# Altium PCB muxduino-shield.PcbDoc
Units mil, origin at the board's own origin, x right, y up, seen from the top; angles counter-clockwise.
Board outline 6000 x 6000 mil, 2 copper layers (Top Layer, Bottom Layer); 29 components, 40 nets, 144 pads, 0 vias.
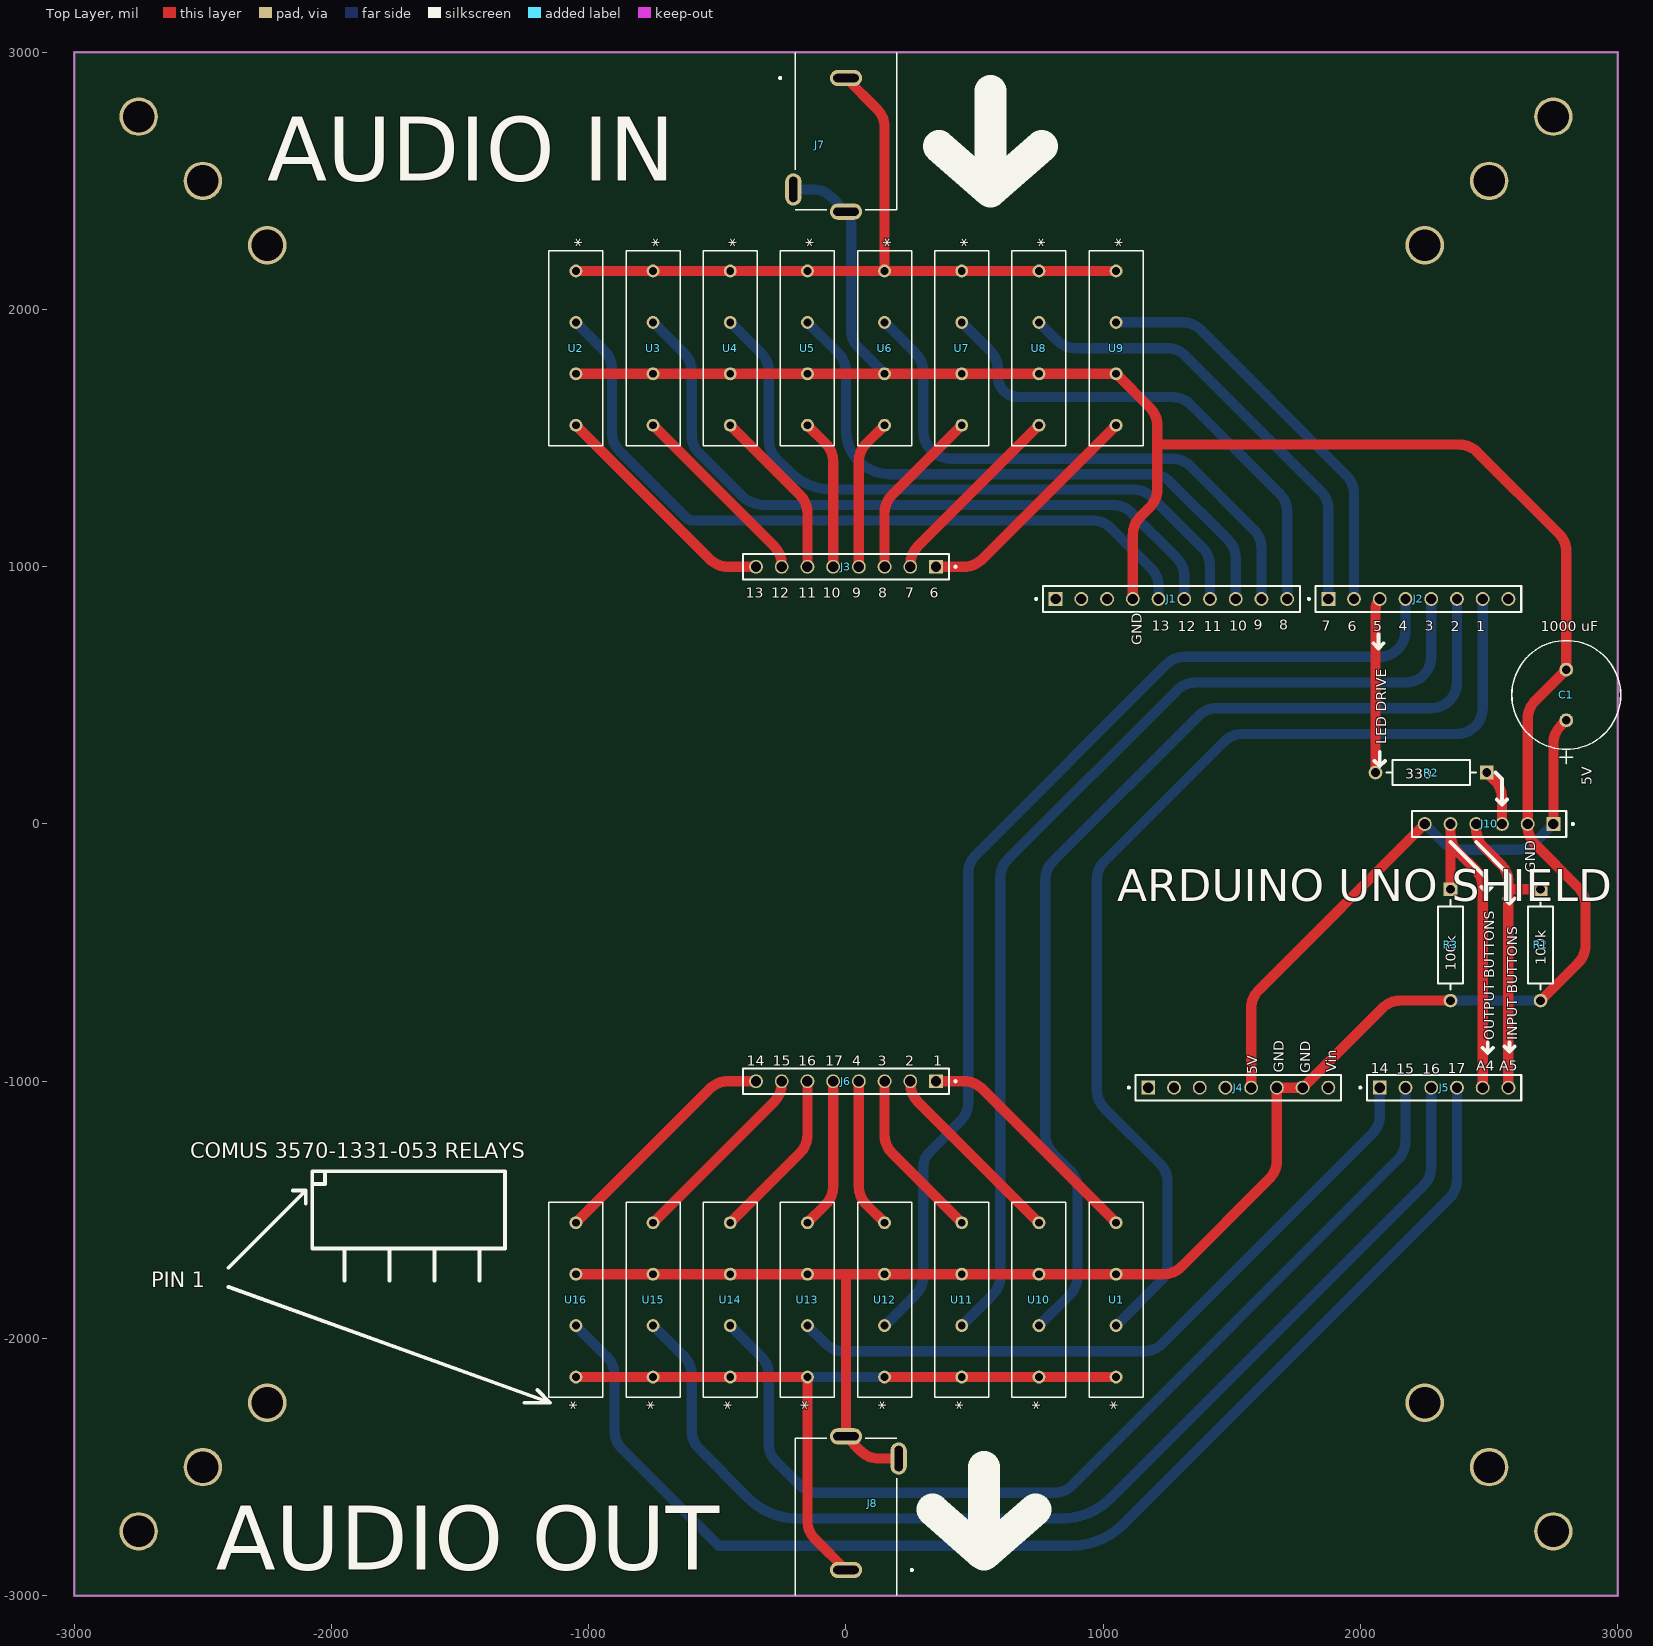
[diagram p0: Top Layer view]
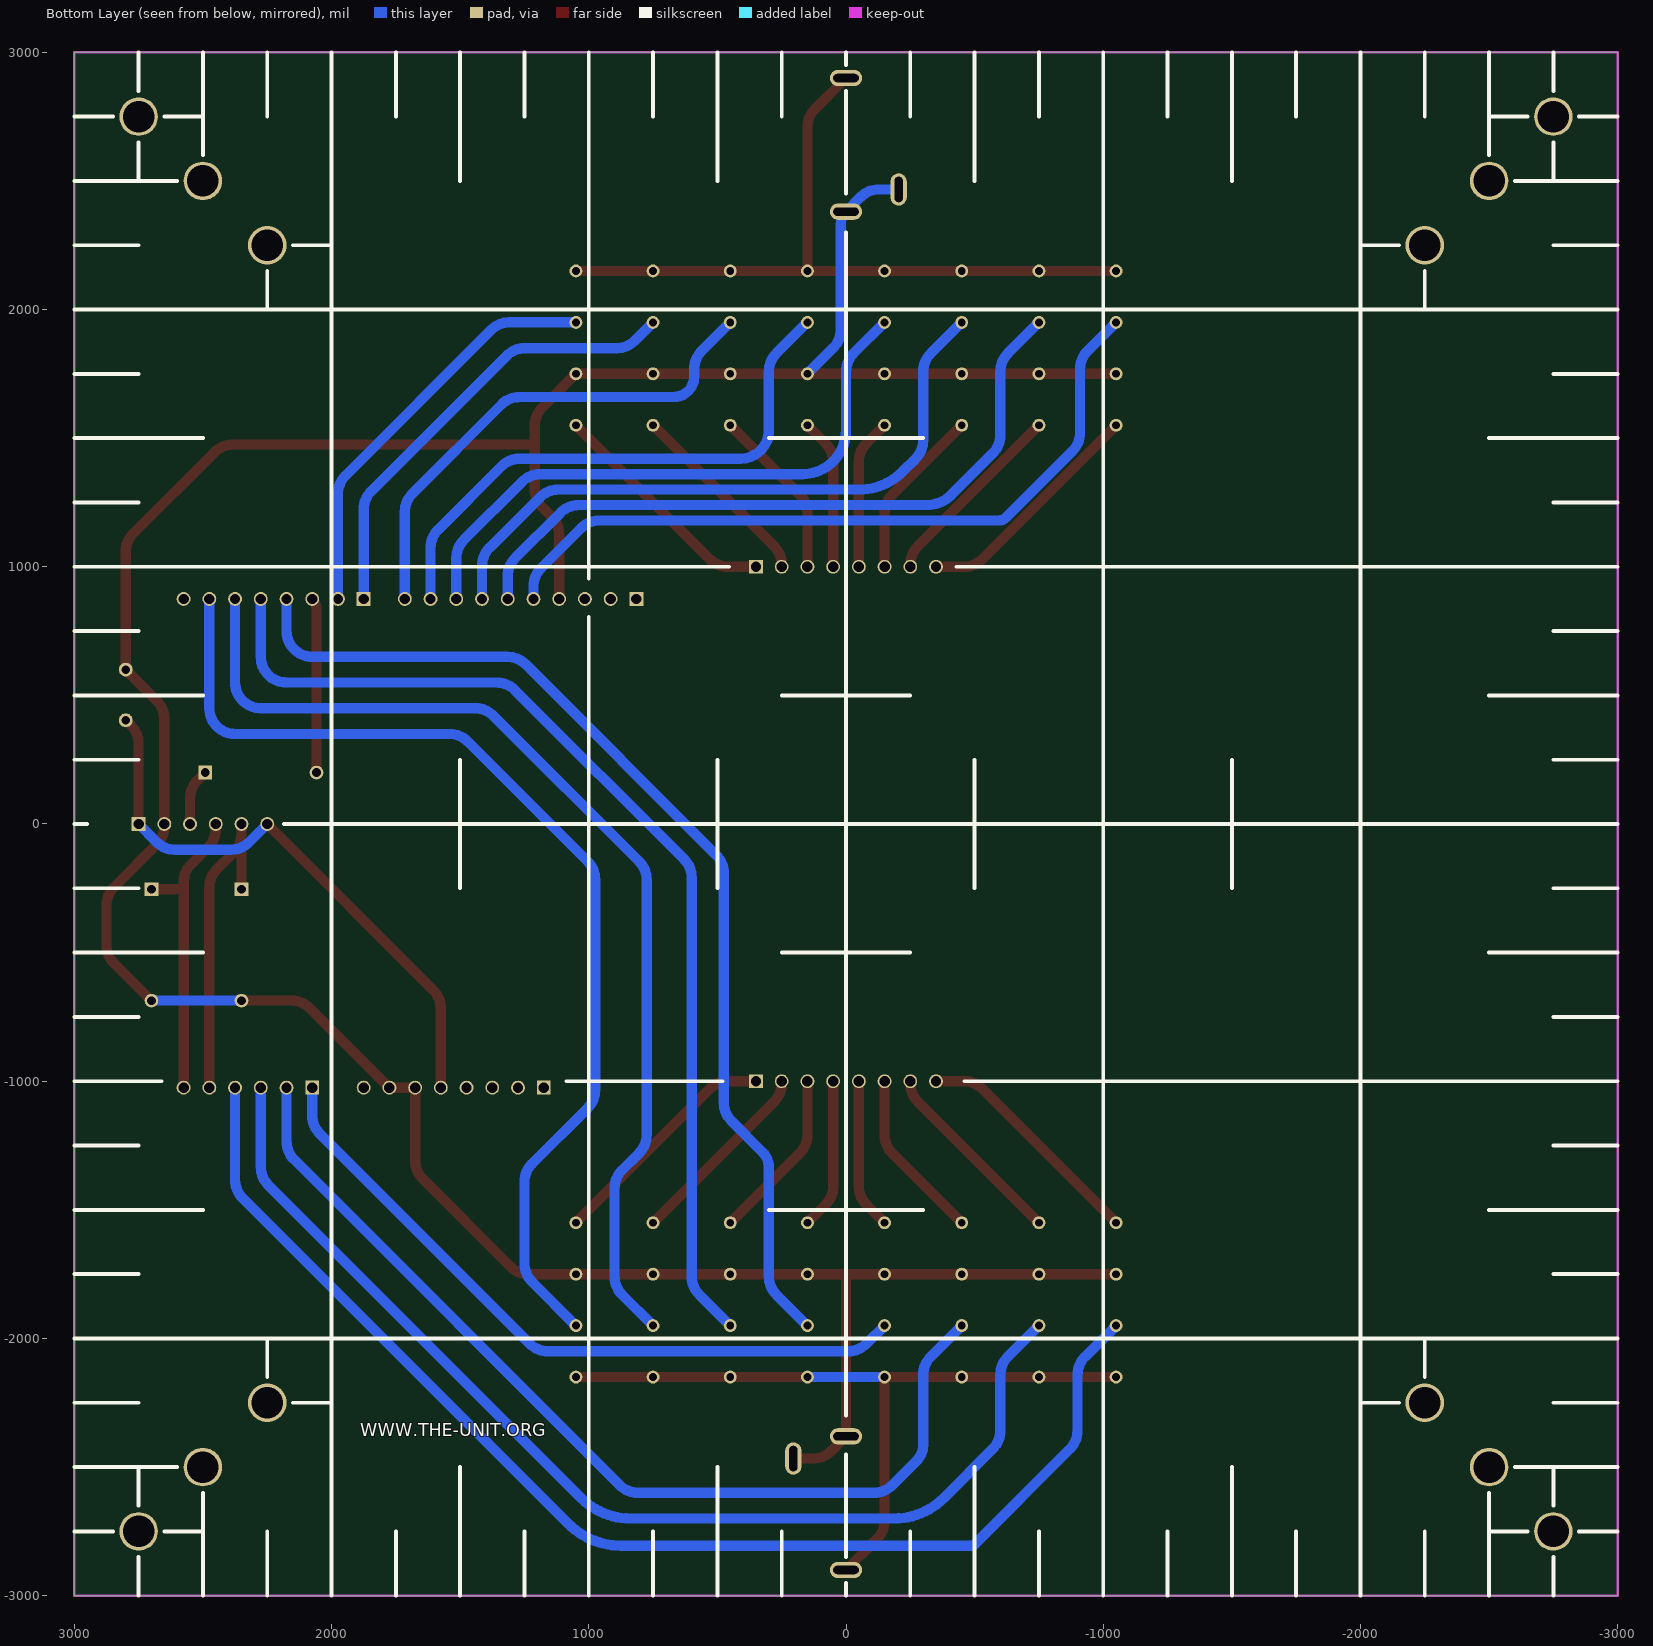
[diagram p1: Bottom Layer view, seen from below]
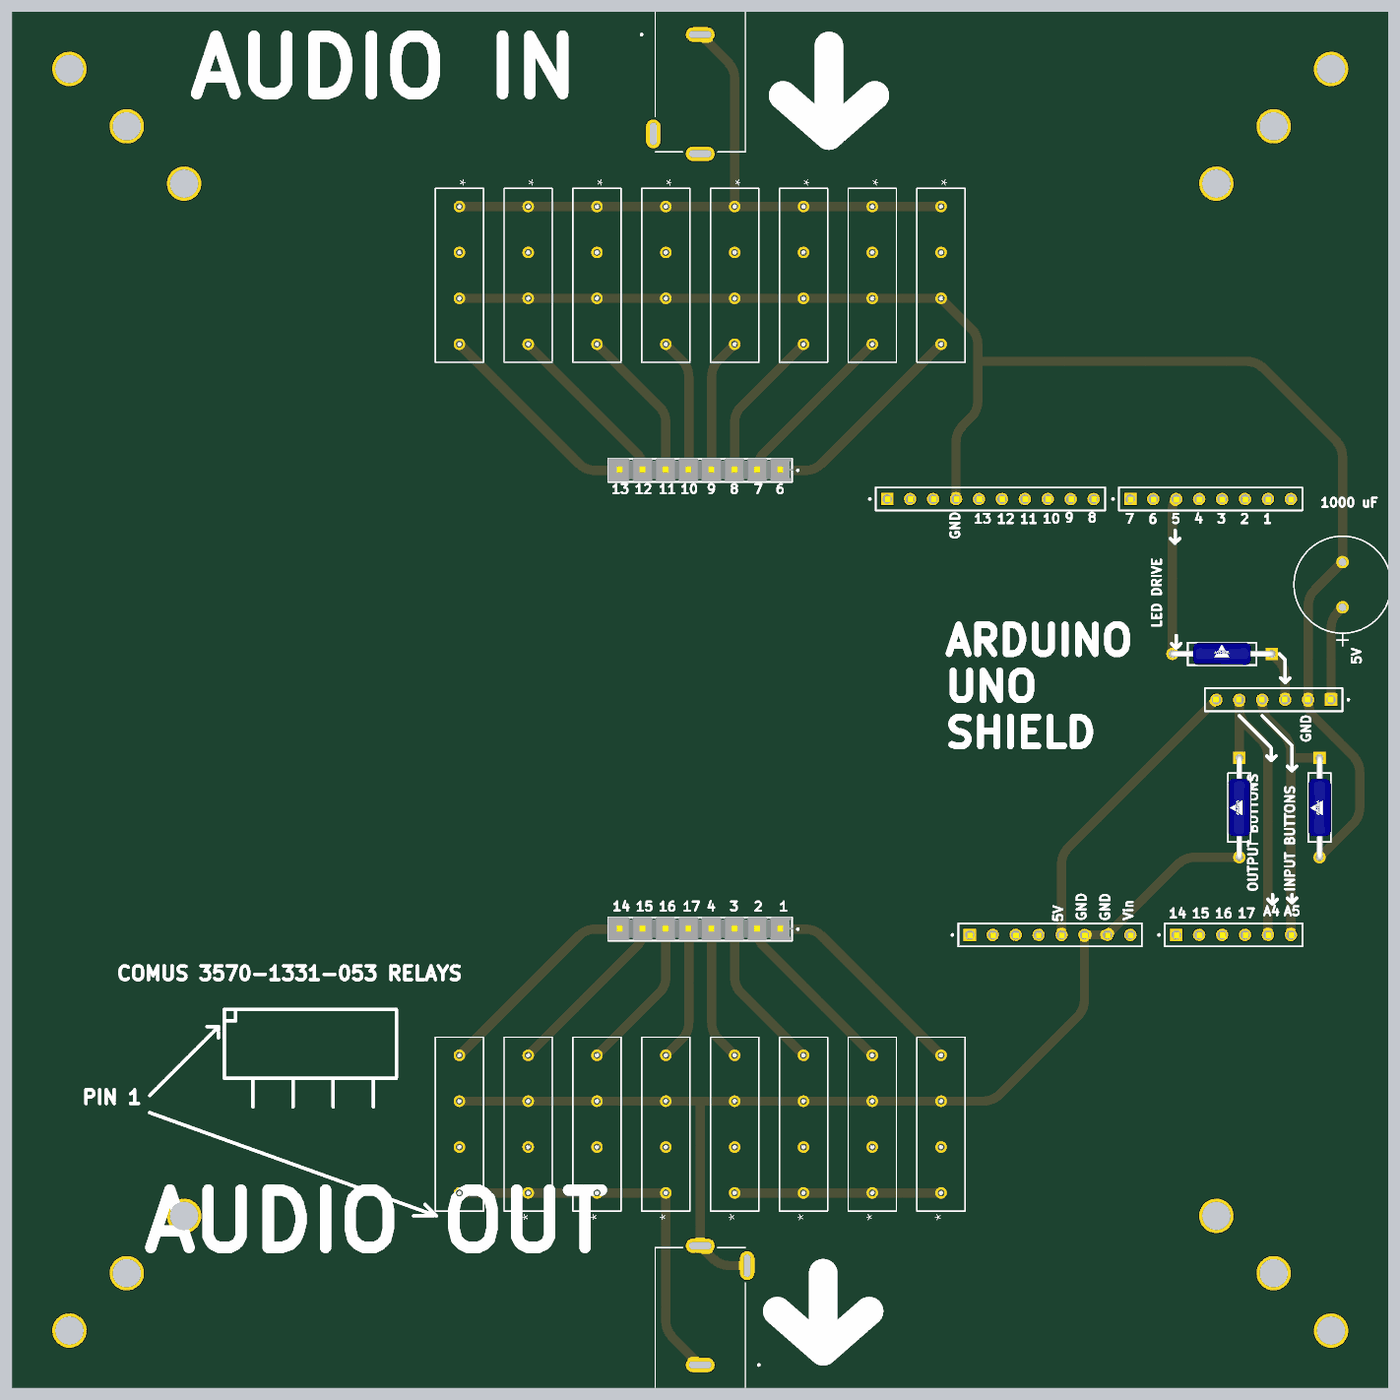
[diagram p2: 3D render of the assembled board from above, using the file's embedded part models]

## Layer stack, top to bottom
Top Solder: solder mask 0.4, Solder Resist, Dk 3.5
Top Layer: signal copper 1.4
Dielectric 1: dielectric 12.6, FR-4, Dk 4.8
Bottom Layer: signal copper 1.4
Bottom Solder: solder mask 0.4, Solder Resist, Dk 3.5

## Board outline
-3000,-3000 -3000,3000 3000,3000 3000,-3000

## Design rules (kind name [scope] priority, off if disabled: settings)
Clearance [All] p1: gap=10 ignorepadtopadclearanceinfootprint=FALSE except(0: Arc-Hole Track-Hole SMDPad-Hole THPad-Hole Via-Hole Fill-Hole Poly-Hole Region-Hole Text-Hole; 4: Arc-Arc Arc-Track Arc-SMDPad Track-Track Track-SMDPad SMDPad-SMDPad)
PolygonConnect [All] p1: connectstyle=Relief reliefconductorwidth=10 reliefentries=4 polygonreliefangle="90 Angle" airgapwidth=10
RoutingVias [All] p1: holewidth=28 width=50 viastyle="Through Hole" minholewidth=28 minwidth=50 maxholewidth=28 maxwidth=50
SolderMaskExpansion [All] p1: expansion=4 istentingtop=FALSE
Width [All] p1: maxlimit=50 minlimit=10 preferedwidth=40 minimp=50.000000 maximp=50.000000 favimp=50.000000
30 further rules are at their usual default settings.

## Classes and differential pairs
component class muxduino-shield: C1 J1 J2 J4 J5 J6 J7 J8 J10 R1 R2 R3 U1 U10 U11 U12 U13 U14 U15 U16

## Components (designator, comment, footprint, x,y, rotation, side; value= is the part's Value field where it differs from the comment)
C1 "16PK1000MEFC10X12.5" CAP_PKPZ_10X12P5_LOW_RUB 2800,403.15 r90 top
J1 "TSW-110-07-G-S" SAMTEC_TSW-110-07-G-S 1265,875 r0 top
J2 "TSW-108-07-G-S" SAMTEC_TSW-108-07-G-S 2225,875 r0 top
J3 "TSW-108-07-G-S-topside" SAMTEC_TSW-108-07-G-S-topside 0,1000 r180 top
J4 "TSW-108-07-G-S" SAMTEC_TSW-108-07-G-S 1525,-1025 r0 top
J5 "TSW-106-07-G-S" SAMTEC_TSW-106-07-G-S 2325,-1025 r0 top
J6 "TSW-108-07-G-S-topside" SAMTEC_TSW-108-07-G-S-topside 0,-1000 r180 top
J7 "MJ-3536N" CUI_MJ-3536N 0,2900 r180 top
J8 "MJ-3536N" CUI_MJ-3536N 0,-2900 r0 top
J10 "TSW-106-07-G-S" SAMTEC_TSW-106-07-G-S 2500,0 r180 top
R1 "100k" FP-RLR07-MFG 2700,-470 r270 top
R2 "330 ohm" FP-RLR07-MFG 2275,200 r180 top
R3 "100k" FP-RLR07-MFG 2350,-470 r270 top
U1 "3570-1331-051" SIP_3570-1331_COM 1050,-2150 r90 top
U2 "3570-1331-051" SIP_3570-1331_COM -1050,2150 r270 top
U3 "3570-1331-051" SIP_3570-1331_COM -750,2150 r270 top
U4 "3570-1331-051" SIP_3570-1331_COM -450,2150 r270 top
U5 "3570-1331-051" SIP_3570-1331_COM -150,2150 r270 top
U6 "3570-1331-051" SIP_3570-1331_COM 150,2150 r270 top
U7 "3570-1331-051" SIP_3570-1331_COM 450,2150 r270 top
U8 "3570-1331-051" SIP_3570-1331_COM 750,2150 r270 top
U9 "3570-1331-051" SIP_3570-1331_COM 1050,2150 r270 top
U10 "3570-1331-051" SIP_3570-1331_COM 750,-2150 r90 top
U11 "3570-1331-051" SIP_3570-1331_COM 450,-2150 r90 top
U12 "3570-1331-051" SIP_3570-1331_COM 150,-2150 r90 top
U13 "3570-1331-051" SIP_3570-1331_COM -150,-2150 r90 top
U14 "3570-1331-051" SIP_3570-1331_COM -450,-2150 r90 top
U15 "3570-1331-051" SIP_3570-1331_COM -750,-2150 r90 top
U16 "3570-1331-051" SIP_3570-1331_COM -1050,-2150 r90 top

## Footprints (in the part's own frame and the unit in brackets; to place one, negate y for a bottom-side part, rotate by r counter-clockwise, add the part's x,y. Pads: shape width x height; smd on the part's side, far side on the other; paste and mask are expansions set on the pad)
CAP_PKPZ_10X12P5_LOW_RUB [mil]
  round 54 / inner round 60 / far side round 54 hole 34 paste-99999 mask+0: 1(0,0) 2(196.85,0)
  silkscreen extent -168,-212 310,212
CUI_MJ-3536N [mm]
  oval 3.2x1.6 hole 0.8 slot 2.5 at 0 deg: 1(0,0) 2(0,13.2)
  oval 1.6x3.2 hole 0.8 slot 2.5 at 90 deg: 3(5.2,11)
  silkscreen extent -5,-2.5 6.6,13
FP-RLR07-MFG [mm]
  rect 1.35x1.35 hole 0.85 paste-2539.97 mask+0: 1(-5.5,0)
  round 1.35 hole 0.85 paste-2539.97 mask+0: 2(5.5,0)
  silkscreen extent -4.43,-1.25 4.43,1.25, body extent -6.27,-1.35 6.27,1.35, height 0.25
SAMTEC_TSW-106-07-G-S [mm]
  rect 1.37x1.37 hole 1.02: 01(-6.35,0)
  round 1.37 hole 1.02: 02(-3.81,0) 03(-1.27,0) 04(1.27,0) 05(3.81,0) 06(6.35,0)
  silkscreen extent -8.37,-1.27 7.62,1.27, body extent -7.68,-1.32 7.68,1.22, height 1.34
SAMTEC_TSW-108-07-G-S [mm]
  rect 1.37x1.37 / inner round 1.37 / far side rect 1.37x1.37 hole 1.02: 01(-8.89,0)
  round 1.37 hole 1.02: 02(-6.35,0) 03(-3.81,0) 04(-1.27,0) 05(1.27,0) 06(3.81,0) 07(6.35,0) 08(8.89,0)
  silkscreen extent -10.91,-1.27 10.16,1.27, body extent -10.25,-1.34 10.2,1.2, height 1.34
SAMTEC_TSW-108-07-G-S-topside [mm]
  rect 1.37x1.37 / inner round 1.37 / far side rect 1.37x1.37 hole 1.02: 01(-8.89,0)
  round 1.37 hole 1.02: 02(-6.35,0) 03(-3.81,0) 04(-1.27,0) 05(1.27,0) 06(3.81,0) 07(6.35,0) 08(8.89,0)
  silkscreen extent -10.91,-1.27 10.16,1.27, body extent -10.25,-1.34 10.2,1.2, height 8.38
SAMTEC_TSW-110-07-G-S [mm]
  rect 1.37x1.37 / inner round 1.37 / far side rect 1.37x1.37 hole 1.02: 01(-11.43,0)
  round 1.37 hole 1.02: 02(-8.89,0) 03(-6.35,0) 04(-3.81,0) 05(-1.27,0) 06(1.27,0) 07(3.81,0) 08(6.35,0) 09(8.89,0) 10(11.43,0)
  silkscreen extent -13.45,-1.27 12.7,1.27, body extent -12.75,-1.3 12.78,1.24, height 1.34
SIP_3570-1331_COM [mil]
  round 50 / inner round 60 / far side round 50 hole 30 paste-99999 mask+0: 1(0,0) 2(200,0) 3(400,0) 4(600,0)
  silkscreen extent -79,-105 679,105, body extent -74,-100 674,100, height 130

## Part data
C1: "No Description Available", Mfr_Name=Rubycon, Copyright="Copyright (C) 2024 Ultra Librarian. All rights reserved.", Manufacturer_Part_Number=16PK1000MEFC10X12.5, RefDes=RefDes, Type=DEV
J1 J5 J7 J8 J10: Package=None, Availability=Unavailable, Price=None
  J1: MF="Samtec Inc.", MP=TSW-110-07-G-S
  J5 J10: MF="Samtec Inc.", MP=TSW-106-07-G-S
  J7 J8: MF="{'manufacturer': u'CUI Devices'}", MP=MJ-3536N
J2 J3 J4 J6: "TSW - Samtec 2.54mm Pin Header 10.92mm Overall Pin Length (07) - Fast Stock", Package=None, Check_prices=https://www.snapeda.com/parts/TSW-108-07-G-S/Samtec+Inc./view-part/?ref=eda, MF="Samtec Inc.", MP=TSW-108-07-G-S, SnapEDA_Link=https://www.snapeda.com/parts/TSW-108-07-G-S/Samtec+Inc./view-part/?ref=snap
R1 R2 R3: library part CMP-00030-39449004-1, "RLR07C1002FSB14 Fixed Resistor, Metal Film, 0.25W, 10000ohm, 250V, 1% +/-Tol, 100ppm/Cel, Through Hole Mount", Case/Package=Conformal, Max Operating Temperature=150°C, Max Power Dissipation=250mW, Min Operating Temperature=-65°C, Resistance=10kΩ, Temperature Coefficient=100ppm/°C, Tolerance=1%, Voltage Rating=250V, Composition="Metal Film", Contact Plating="Lead, Tin", Diameter=2.29mm, Failure Rate=0.001%, Features="Military, Moisture Resistant, Weldable", Lead Diameter=640µm, Lead Free="Contains Lead", Lead Length=38.1mm, Length=7.62mm, Military Standard=MIL-PRF-39017, Mount="Through Hole", NexarPartId=39449004, Number of Pins=14, Number of Terminations=2, Packaging=Bulk, Power Rating=250mW, Radiation Hardening=No, REACH SVHC=Unknown, RoHS=Non-Compliant, Schedule B="8533210090, 8533210090", Termination=Axial, Voltage Rating (DC)=250V, Width=2.29mm, Wire/Cable Diameter=50.8µm
U1 U2 U3 U4 U5 U6 U7 U8 U9 U10 U11 U12 U13 U14 U15 U16: "No Description Available", Mfr_Name=Comus, Copyright="Copyright (C) 2024 Ultra Librarian. All rights reserved.", Manufacturer_Part_Number=3570-1331-051, RefDes=RefDes, Type=DEV

## Free pads (board coordinates)
  round 150 hole 123 unplated: 8(-2750,-2750) 8(-2750,2750) 8(-2500,-2500) 8(-2500,2500) 8(-2250,-2250) 8(-2250,2250) 8(2250,-2250) 8(2250,2250) 8(2500,-2500) 8(2500,2500) 8(2750,-2750) 8(2750,2750)

## Nets (pads, with @x,y where several pads share a name; then routed paths per layer and width w, separated by ;. In a path a pad name is that pad's centre, name@x,y a point inside that pad or via, vN(x,y) a via of type N, cw(c..) or ccw(c..) an arc to the next point about the centre after c; other vN are vias at no path point)
GND: C1.2 J1.04 J4.06 J4.07 J7.2 J7.3 J8.2 J8.3 J10.02 R1.2 R3.2 U1.3 U2.3 U3.3 U4.3 U5.3 U6.3 U7.3 U8.3 U9.3 U10.3 U11.3 U12.3 U13.3 U14.3 U15.3 U16.3 | length 12957.7
  Top Layer w40: U16.3 U15.3 U14.3 U13.3 0,-1750 ; U2.3 U3.3 U4.3 U5.3 U6.3 U7.3 U8.3 U9.3 1180.71,1619.29 cw(c1110,1548.58) 1210,1548.58 1210,1475 ; 57.32,-2437.64 J8.2 0,-1750 ; 57.32,-2437.64 ccw(c128.04,-2366.93) 128.04,-2466.93 J8.3 ; J1.04 1115,1123.58 cw(c1215,1123.58) 1144.29,1194.29 1180.71,1230.71 ccw(c1110,1301.42) 1210,1301.42 1210,1475 ; R3.2 2154.89,-686.54 ccw(c2154.89,-786.54) 2084.17,-715.82 J4.07 J4.06 1675,-1308.58 cw(c1575,-1308.58) 1645.71,-1379.29 1304.29,-1720.71 cw(c1233.58,-1650) 1233.58,-1750 U1.3 U10.3 U11.3 U12.3 0,-1750 ; R1.2 2845.71,-540.82 ccw(c2775,-470.11) 2875,-470.11 2875,-316.42 ccw(c2775,-316.42) 2845.71,-245.71 2679.29,-79.29 cw(c2750,-8.58) 2650,-8.58 J10.02 2650,408.58 cw(c2750,408.58) 2679.29,479.29 C1.2 2800,1058.58 ccw(c2700,1058.58) 2770.71,1129.29 2454.29,1445.71 ccw(c2383.58,1375) 2383.58,1475 1210,1475
  Bottom Layer w40: J7.3 -128.04,2466.93 cw(c-128.04,2366.93) -57.32,2437.64 J7.2 cw(c-48.28,2332.03) 20,2332.03 20,1921.42 ccw(c120,1921.42) 49.29,1850.71 U6.3 ; R3.2 R1.2
NetC1_1: C1.1 J4.05 J10.01 J10.06 | length 2294.1
  Top Layer w40: J4.05 1575,-716.42 cw(c1675,-716.42) 1604.29,-645.71 J10.06 ; J10.01 2750,311.73 cw(c2850,311.73) 2779.29,382.44 C1.1
  Bottom Layer w40: J10.06 2320.71,-70.71 ccw(c2391.42,0) 2391.42,-100 2608.58,-100 ccw(c2608.58,0) 2679.29,-70.71 J10.01
NetJ1_05: J1.05 U2.2 | length 2937.7
  Bottom Layer w40: U2.2 -939.29,1839.29 cw(c-1010,1768.58) -910,1768.58 -910,1521.42 ccw(c-810,1521.42) -880.71,1450.71 -619.29,1189.29 ccw(c-596.86,1211.71) -596.86,1180 958.58,1180 cw(c958.58,1080) 1029.29,1150.71 1185.71,994.29 cw(c1115,923.58) 1215,923.58 J1.05
NetJ1_06: J1.06 U3.2 | length 2756.8
  Bottom Layer w40: U3.2 -629.29,1829.29 cw(c-700,1758.58) -600,1758.58 -600,1511.42 ccw(c-500,1511.42) -570.71,1440.71 -409.29,1279.29 ccw(c-314.44,1374.14) -314.44,1240 1038.58,1240 cw(c1038.58,1140) 1109.29,1210.71 1285.71,1034.29 cw(c1215,963.58) 1315,963.58 J1.06
NetJ1_07: J1.07 U4.2 | length 2587.5
  Bottom Layer w40: U4.2 -329.29,1829.29 cw(c-400,1758.58) -300,1758.58 -300,1491.42 ccw(c-200,1491.42) -270.71,1420.71 -219.29,1369.29 ccw(c-52.01,1536.57) -52.01,1300 1118.58,1300 cw(c1118.58,1200) 1189.29,1270.71 1385.71,1074.29 cw(c1315,1003.58) 1415,1003.58 J1.07
NetJ1_08: J1.08 U5.2 | length 2399.3
  Bottom Layer w40: U5.2 -29.29,1829.29 cw(c-100,1758.58) 0,1758.58 0,1530 ccw(c170,1530) 170,1360 1188.58,1360 cw(c1188.58,1260) 1259.29,1330.71 1485.71,1104.29 cw(c1415,1033.58) 1515,1033.58 J1.08
NetJ1_09: J1.09 U6.2 | length 2213.3
  Bottom Layer w40: U6.2 270.71,1829.29 cw(c200,1758.58) 300,1758.58 300,1530 ccw(c410,1530) 410,1420 1268.58,1420 cw(c1268.58,1320) 1339.29,1390.71 1585.71,1144.29 cw(c1515,1073.58) 1615,1073.58 J1.09
NetJ1_10: J1.10 U7.2 | length 1973.5
  Bottom Layer w40: U7.2 560.71,1839.29 cw(c490,1768.58) 590,1768.58 590,1740 ccw(c670,1740) 670,1660 1268.58,1660 cw(c1268.58,1560) 1339.29,1630.71 1685.71,1284.29 cw(c1615,1213.58) 1715,1213.58 J1.10
NetJ2_01: J2.01 U8.2 | length 1785.8
  Bottom Layer w40: U8.2 820.71,1879.29 ccw(c891.42,1950) 891.42,1850 1248.58,1850 cw(c1248.58,1750) 1319.29,1820.71 1845.71,1294.29 cw(c1775,1223.58) 1875,1223.58 J2.01
NetJ2_02: J2.02 U9.2 | length 1625.3
  Bottom Layer w40: U9.2 1308.58,1950 cw(c1308.58,1850) 1379.29,1920.71 1945.71,1354.29 cw(c1875,1283.58) 1975,1283.58 J2.02
NetJ2_03: J2.03 R2.2 | length 679.4
  Top Layer w40: R2.2 2058.46,835.08 cw(c2114.92,835.08) J2.03
NetJ2_04: J2.04 U12.2 | length 4127.2
  Bottom Layer w40: U12.2 270.71,-1829.29 ccw(c200,-1758.58) 300,-1758.58 300,-1335.36 cw(c385.36,-1335.36) 325,-1275 445.71,-1154.29 ccw(c375,-1083.58) 475,-1083.58 475,-191.42 cw(c575,-191.42) 504.29,-120.71 1245.71,620.71 cw(c1316.42,550) 1316.42,650 2075,650 ccw(c2075,750) 2175,750 J2.04
NetJ2_05: J2.05 U11.2 | length 4086.6
  Bottom Layer w40: U11.2 570.71,-1829.29 ccw(c500,-1758.58) 600,-1758.58 600,-207.84 cw(c700,-207.84) 629.29,-137.13 1287.13,520.71 cw(c1357.84,450) 1357.84,550 2175,550 ccw(c2175,650) 2275,650 J2.05
NetJ2_06: J2.06 U10.2 | length 4108.4
  Bottom Layer w40: U10.2 870.71,-1829.29 ccw(c800,-1758.58) 900,-1758.58 900,-1416.42 ccw(c800,-1416.42) 870.71,-1345.71 804.29,-1279.29 cw(c875,-1208.58) 775,-1208.58 775,-216.42 cw(c875,-216.42) 804.29,-145.71 1370.71,420.71 cw(c1441.42,350) 1441.42,450 2275,450 ccw(c2275,550) 2375,550 J2.06
NetJ2_07: J2.07 U1.2 | length 4149.8
  Bottom Layer w40: U1.2 1220.71,-1779.29 ccw(c1150,-1708.58) 1250,-1708.58 1250,-1391.42 ccw(c1150,-1391.42) 1220.71,-1320.71 1004.29,-1104.29 cw(c1075,-1033.58) 975,-1033.58 975,-216.42 cw(c1075,-216.42) 1004.29,-145.71 1470.71,320.71 cw(c1541.42,250) 1541.42,350 2375,350 ccw(c2375,450) 2475,450 J2.07
NetJ3_01: J3.01 U9.4 | length 923.5
  Top Layer w40: J3.01 458.58,1000 ccw(c458.58,1100) 529.29,1029.29 U9.4
NetJ3_02: J3.02 U8.4 | length 752.8
  Top Layer w40: J3.02 250,1008.58 cw(c350,1008.58) 279.29,1079.29 U8.4
NetJ3_03: J3.03 U7.4 | length 670
  Top Layer w40: J3.03 150,1208.58 cw(c250,1208.58) 179.29,1279.29 U7.4
NetJ3_04: J3.04 U6.4 | length 587.1
  Top Layer w40: J3.04 50,1408.58 cw(c150,1408.58) 79.29,1479.29 U6.4
NetJ3_05: J3.05 U5.4 | length 587.1
  Top Layer w40: U5.4 -79.29,1479.29 cw(c-150,1408.58) -50,1408.58 J3.05
NetJ3_06: J3.06 U4.4 | length 670
  Top Layer w40: U4.4 -179.29,1279.29 cw(c-250,1208.58) -150,1208.58 J3.06
NetJ3_07: J3.07 U3.4 | length 752.8
  Top Layer w40: U3.4 -279.29,1079.29 cw(c-350,1008.58) -250,1008.58 J3.07
NetJ3_08: J3.08 U2.4 | length 923.5
  Top Layer w40: U2.4 -529.29,1029.29 ccw(c-458.58,1100) -458.58,1000 J3.08
NetJ5_01: J5.01 U13.2 | length 2765.9
  Bottom Layer w40: U13.2 -79.29,-2020.71 ccw(c-8.58,-1950) -8.58,-2050 1158.58,-2050 ccw(c1158.58,-1950) 1229.29,-2020.71 2045.71,-1204.29 ccw(c1975,-1133.58) 2075,-1133.58 J5.01
NetJ5_02: J5.02 U14.2 | length 3877.2
  Bottom Layer w40: U14.2 -329.29,-2070.71 cw(c-400,-2141.42) -300,-2141.42 -300,-2414.64 ccw(c-214.64,-2414.64) -275,-2475 -179.29,-2570.71 ccw(c-108.58,-2500) -108.58,-2600 808.58,-2600 ccw(c808.58,-2500) 879.29,-2570.71 2145.71,-1304.29 ccw(c2075,-1233.58) 2175,-1233.58 J5.02
NetJ5_03: J5.03 U15.2 | length 4374
  Bottom Layer w40: U15.2 -629.29,-2070.71 cw(c-700,-2141.42) -600,-2141.42 -600,-2358.58 ccw(c-500,-2358.58) -570.71,-2429.29 -379.29,-2620.71 ccw(c-187.87,-2429.29) -187.87,-2700 837.87,-2700 ccw(c837.87,-2429.29) 1029.29,-2620.71 2245.71,-1404.29 ccw(c2175,-1333.58) 2275,-1333.58 J5.03
NetJ5_04: J5.04 U16.2 | length 4901.7
  Bottom Layer w40: U16.2 -929.29,-2070.71 cw(c-1000,-2141.42) -900,-2141.42 -900,-2358.58 ccw(c-800,-2358.58) -870.71,-2429.29 -494.29,-2805.71 874.08,-2805.71 ccw(c874.08,-2515.5) 1079.29,-2720.71 2345.71,-1454.29 ccw(c2275,-1383.58) 2375,-1383.58 J5.04
NetJ5_05: J5.05 J10.05 R3.1 | length 1283.1
  Top Layer w40: R3.1 2350,-38.58 ; J10.05 2350,-38.58 ; J5.05 2475,-246.42 ccw(c2375,-246.42) 2445.71,-175.71 2379.29,-109.29 cw(c2450,-38.58) 2350,-38.58
NetJ5_06: J5.06 J10.04 R1.1 | length 1194.9
  Top Layer w40: J10.04 2450,-18.58 ccw(c2550,-18.58) 2479.29,-89.29 2545.71,-155.71 cw(c2475,-226.42) 2575,-226.42 2575,-260 ; J5.06 2575,-260 ; R1.1 2590.78,-253.46 ccw(c2590.78,-275.78) 2575,-260
NetJ6_01: J6.01 U1.4 | length 923.5
  Top Layer w40: J6.01 458.58,-1000 cw(c458.58,-1100) 529.29,-1029.29 U1.4
NetJ6_02: J6.02 U10.4 | length 752.8
  Top Layer w40: J6.02 250,-1008.58 ccw(c350,-1008.58) 279.29,-1079.29 U10.4
NetJ6_03: J6.03 U11.4 | length 670
  Top Layer w40: J6.03 150,-1208.58 ccw(c250,-1208.58) 179.29,-1279.29 U11.4
NetJ6_04: J6.04 U12.4 | length 587.1
  Top Layer w40: J6.04 50,-1408.58 ccw(c150,-1408.58) 79.29,-1479.29 U12.4
NetJ6_05: J6.05 U13.4 | length 587.1
  Top Layer w40: U13.4 -79.29,-1479.29 ccw(c-150,-1408.58) -50,-1408.58 J6.05
NetJ6_06: J6.06 U14.4 | length 670
  Top Layer w40: U14.4 -179.29,-1279.29 ccw(c-250,-1208.58) -150,-1208.58 J6.06
NetJ6_07: J6.07 U15.4 | length 752.8
  Top Layer w40: U15.4 -279.29,-1079.29 ccw(c-350,-1008.58) -250,-1008.58 J6.07
NetJ6_08: J6.08 U16.4 | length 923.5
  Top Layer w40: U16.4 -529.29,-1029.29 cw(c-458.58,-1100) -458.58,-1000 J6.08
NetJ7_1: J7.1 U2.1 U3.1 U4.1 U5.1 U6.1 U7.1 U8.1 U9.1 | length 2907.8
  Top Layer w40: U2.1 U3.1 U4.1 U5.1 U6.1 ; J7.1 120.71,2779.29 cw(c50,2708.58) 150,2708.58 U6.1 ; U9.1 U8.1 U7.1 U6.1
NetJ8_1: J8.1 U1.1 U10.1 U11.1 U12.1 U13.1 U14.1 U15.1 U16.1 | length 2907.8
  Top Layer w40: U16.1 U15.1 U14.1 U13.1 -150,-2708.58 ccw(c-50,-2708.58) -120.71,-2779.29 J8.1 ; U12.1 U11.1 U10.1 U1.1
  Bottom Layer w40: U13.1 U12.1
NetJ10_03: J10.03 R2.1 | length 219.9
  Top Layer w40: R2.1 2520.71,170.82 cw(c2450,100.11) 2550,100.11 J10.03
pads on no net: J1.01 J1.02 J1.03 J2.08 J4.01 J4.02 J4.03 J4.04 J4.08

## Keep-outs
Keep-Out Layer:
  the board outline again, w10

## Silkscreen, mask and mechanical layers (free items; w line width, h text height)
Top Overlay:
  lines w10: -1250,-2250 -1150,-2250
  lines w15: -2400,-1800 -1150,-2250 ; -2400,-1725 -2100,-1425 ; -2150,-1425 -2100,-1425 ; -2075,-1400 -2025,-1400 -2025,-1350 ; -1950,-1775 -1950,-1650 ; -1775,-1775 -1775,-1650 ; -1600,-1775 -1600,-1650 ; -1425,-1775 -1425,-1650 ; -1250,-2250 -1150,-2250 ; -1200,-2200 -1150,-2250 ; 2050,702.5 2070,682.5 ; 2055,245 2075,225 ; 2070,737.5 2070,682.5 ; 2075,280 2075,225 ; 2090,702.5 2070,682.5 ; 2095,245 2075,225 ; 2350,-70 2486.46,-206.46 cw(c2477.93,-215) 2490,-215 2490,-265 ; 2450,-70 2580,-200 2580,-240 2580,-310 ; 2470,-245 2490,-265 ; 2475,-870 2495,-890 ; 2495,-850 2495,-890 ; 2510,-245 2490,-265 ; 2515,-870 2495,-890 ; 2525,200 2550,175 2550,75 ; 2530,95 2550,75 ; 2560,-865 2580,-885 ; 2560,-290 2580,-310 ; 2570,95 2550,75 ; 2580,-850 2580,-885 ; 2600,-865 2580,-885 ; 2600,-290 2580,-310 ; -2100,-1425 -2100,-1475 -2100,-1450 -2100,-1425 ; -2075,-1650 -1325,-1650 -1325,-1350 -2075,-1350 -2075,-1650
  lines w125: 336.1,-2665.45 536.1,-2840.45 736.1,-2665.45 ; 361.1,2634.55 561.1,2459.55 761.1,2634.55 ; 536.1,-2815.45 536.1,-2500 ; 561.1,2484.55 561.1,2850
  text "AUDIO IN" at -2250,2500 h250
  text "13" at -390,880 h39.37
  text "12" at -290,880 h39.37
  text "11" at -185,880 h39.37
  text "10" at -90,880 h39.37
  text "9" at 25,880 h39.37
  text "8" at 125,880 h39.37
  text "7" at 230,880 h39.37
  text "6" at 325,880 h39.37
  text "9" at 1585,755 h39.37
  text "8" at 1685,755 h39.37
  text "13" at 1189.12,750.56 h39.37
  text "10" at 1489.12,750.56 h39.37
  text "7" at 1849.12,750.56 h39.37
  text "4" at 2149.12,750.56 h39.37
  text "3" at 2249.12,750.56 h39.37
  text "12" at 1290,750 h39.37
  text "11" at 1390,750 h39.37
  text "6" at 1950,750 h39.37
  text "5" at 2050,750 h39.37
  text "2" at 2350,750 h39.37
  text "1" at 2450,750 h39.37
  text "1000 uF" at 2700,750 h39.37
  text "GND" at 1150,695 h39.37 r90
  text "LED DRIVE" at 2100,310 h39.37 r90
  text "330" at 2175,175 h39.37
  text "5V" at 2900,150 h39.37 r90
  text "GND" at 2680,-190 h39.37 r90
  text "ARDUINO UNO SHIELD" at 1055,-300 h125
  text "100k" at 2720,-550 h39.37 r90
  text "100k" at 2370,-570 h39.37 r90
  text "OUTPUT BUTTONS" at 2520,-840 h39.37 r90
  text "INPUT BUTTONS" at 2610,-840 h39.37 r90
  text "14" at -385.88,-939.44 h39.37
  text "4" at 24.12,-939.44 h39.37
  text "3" at 124.12,-939.44 h39.37
  text "15" at -285,-940 h39.37
  text "16" at -185,-940 h39.37
  text "17" at -80,-940 h39.37
  text "2" at 230,-940 h39.37
  text "1" at 340,-940 h39.37
  text "A4" at 2450,-960 h39.37
  text "A5" at 2540,-960 h39.37
  text "Vin" at 1905,-965 h39.37 r90
  text "GND" at 1700.84,-967.21 h39.37 r90
  text "GND" at 1803.81,-968.07 h39.37 r90
  text "14" at 2039.12,-969.44 h39.37
  text "17" at 2339.12,-969.44 h39.37
  text "15" at 2140,-970 h39.37
  text "16" at 2240,-970 h39.37
  text "5V" at 1599.23,-972.61 h39.37 r90
  text "COMUS 3570-1331-053 RELAYS" at -2550,-1300 h60
  text "PIN 1" at -2700,-1800 h60
  text "AUDIO OUT" at -2450,-2900 h250
Bottom Overlay:
  drawing of 168 lines, arcs and shapes, not listed
  text "WWW.THE-UNIT.ORG" at 1888.14,-2379.87 h50

## Text inside footprints (layer, text, board x,y; h text height)
U1: Top Overlay "*" at 1075,-2276.5 h50 r90; Mechanical 13 "*" at 1075,-2226.5 h50 r90
U2: Top Overlay "*" at -1075,2276.5 h50 r270; Mechanical 13 "*" at -1075,2226.5 h50 r270
U3: Top Overlay "*" at -775,2276.5 h50 r270; Mechanical 13 "*" at -775,2226.5 h50 r270
U4: Top Overlay "*" at -475,2276.5 h50 r270; Mechanical 13 "*" at -475,2226.5 h50 r270
U5: Top Overlay "*" at -175,2276.5 h50 r270; Mechanical 13 "*" at -175,2226.5 h50 r270
U6: Top Overlay "*" at 125,2276.5 h50 r270; Mechanical 13 "*" at 125,2226.5 h50 r270
U7: Top Overlay "*" at 425,2276.5 h50 r270; Mechanical 13 "*" at 425,2226.5 h50 r270
U8: Top Overlay "*" at 725,2276.5 h50 r270; Mechanical 13 "*" at 725,2226.5 h50 r270
U9: Top Overlay "*" at 1025,2276.5 h50 r270; Mechanical 13 "*" at 1025,2226.5 h50 r270
U10: Top Overlay "*" at 775,-2276.5 h50 r90; Mechanical 13 "*" at 775,-2226.5 h50 r90
U11: Top Overlay "*" at 475,-2276.5 h50 r90; Mechanical 13 "*" at 475,-2226.5 h50 r90
U12: Top Overlay "*" at 175,-2276.5 h50 r90; Mechanical 13 "*" at 175,-2226.5 h50 r90
U13: Top Overlay "*" at -125,-2276.5 h50 r90; Mechanical 13 "*" at -125,-2226.5 h50 r90
U14: Top Overlay "*" at -425,-2276.5 h50 r90; Mechanical 13 "*" at -425,-2226.5 h50 r90
U15: Top Overlay "*" at -725,-2276.5 h50 r90; Mechanical 13 "*" at -725,-2226.5 h50 r90
U16: Top Overlay "*" at -1025,-2276.5 h50 r90; Mechanical 13 "*" at -1025,-2226.5 h50 r90